# EAGLE board Qwiic_MultiStar_pattern-Panel (EAGLE 9.6.2)
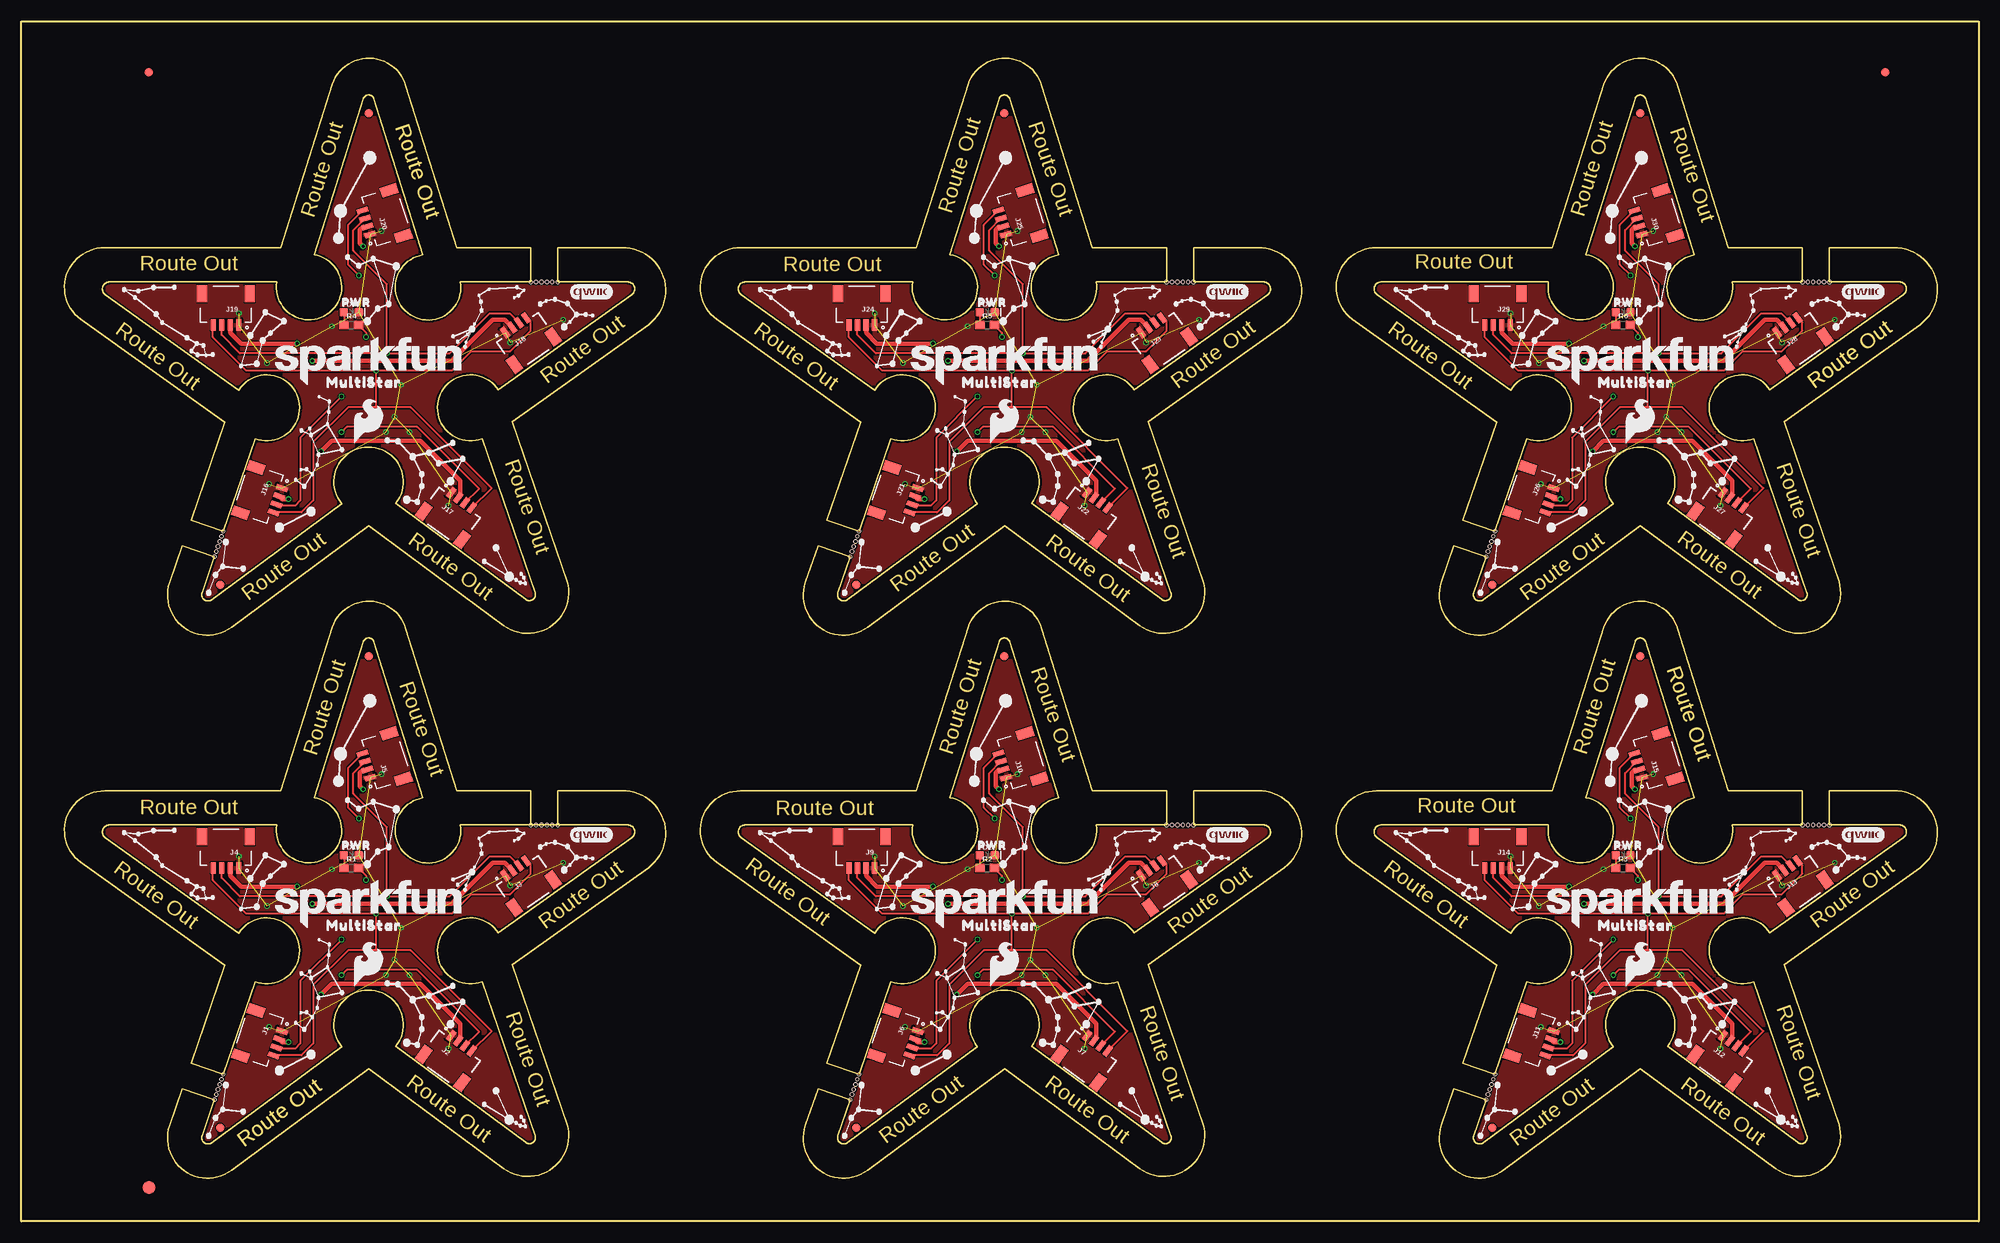
[diagram p0: board, top side]
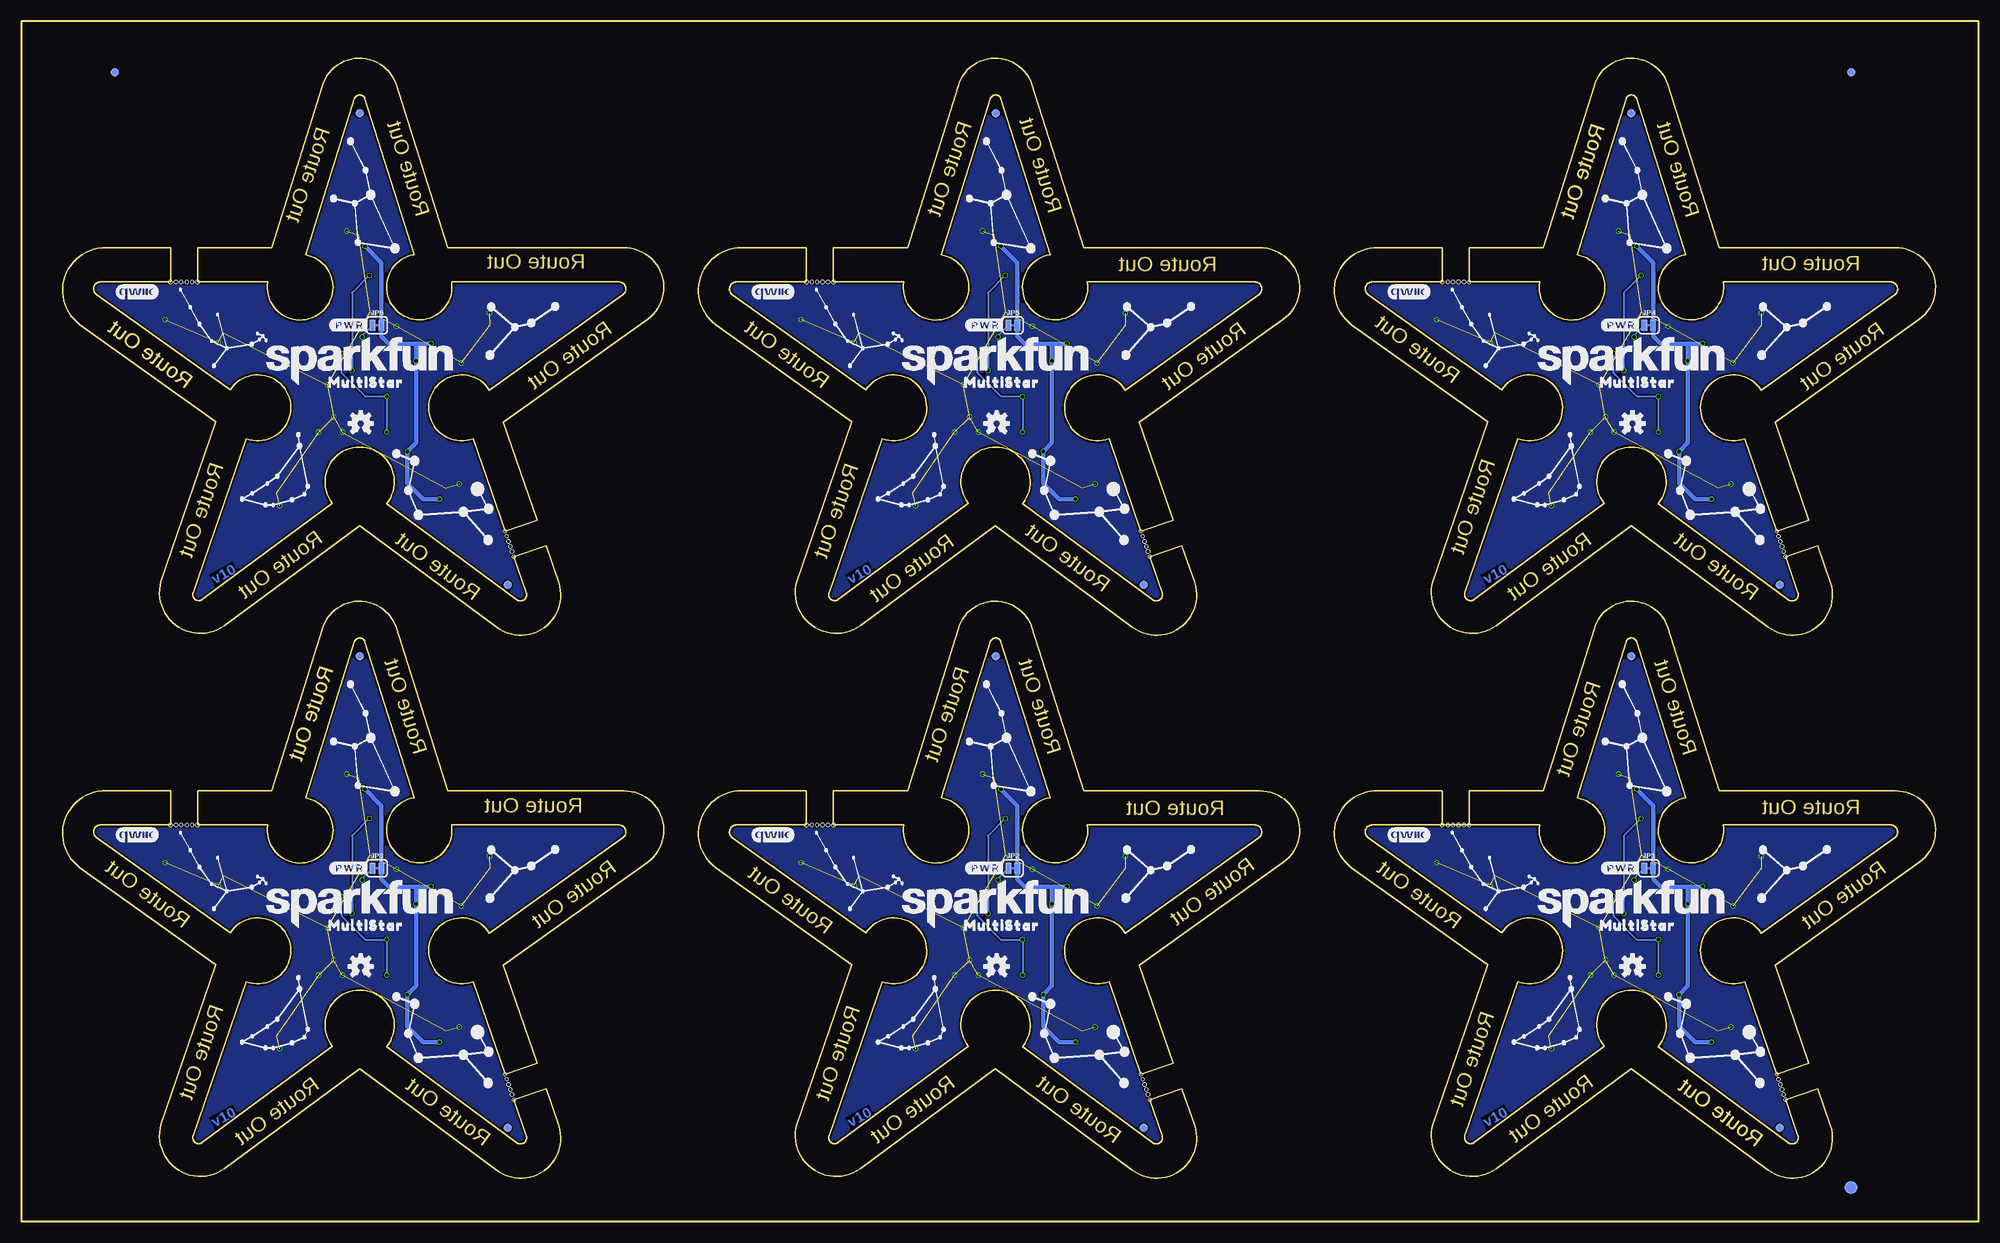
[diagram p1: board, bottom side, seen from below]

Size 229.99 x 141 mm. Coordinates in mm from the lower left corner, seen from the top.
Outline: 63.03,46.58 71.24,46.58 arc-144 71.72,45.08 56.04,33.89 arc258 54.14,28.16 60.37,10.05 arc-145 59.27,9.27 44,20.57 arc257 37.63,20.54 22.36,9.23 arc-145 21.23,10.05 22.69,14.29 18.91,15.59 17.42,11.26 arc145 24.72,6 40.82,17.92 56.71,6.2 arc142 64.15,11.38 57.69,30.14 73.7,41.57 arc145 70.59,50.58 63.03,50.58 63.03,46.58
Outline: 63.03,46.58 59.85,46.58
Outline: 59.85,46.58 51.6,46.58 arc-270 47.17,49.76 41.42,68.09 arc145 40.19,68.09 34.41,49.77 arc-270 30.01,46.58 10.37,46.58 arc144 9.88,45.07 25.56,33.88 arc-258 27.47,28.16 23.73,17.29 19.94,18.59 23.91,30.11 6.99,42.18 arc-145 9.79,50.58 30.47,50.58 36.53,69.8 arc-145 45.2,69.58 51.15,50.59 59.85,50.58 59.85,46.58
Outline: 121.88,49.76 116.13,68.09 arc145 114.89,68.09 109.12,49.77 arc-270 104.72,46.58 85.08,46.58 arc144 84.59,45.07 100.27,33.88 arc-258 102.18,28.16 98.44,17.29 94.65,18.59 98.62,30.11 81.69,42.18 arc-145 84.5,50.58 105.18,50.58 111.24,69.8 arc-145 119.91,69.58 125.86,50.59 134.56,50.58 134.56,46.58 126.31,46.58 arc-270 121.88,49.76
Outline: 97.4,14.29 95.94,10.05 arc145 97.07,9.23 112.34,20.54 arc-257 118.71,20.57 133.98,9.27 arc145 135.08,10.05 128.85,28.16 arc-258 130.75,33.89 146.43,45.08 arc144 145.95,46.58 137.74,46.58 137.74,50.58 145.3,50.58 arc-145 148.41,41.57 132.4,30.14 138.86,11.38 arc-142 131.42,6.2 115.53,17.92 99.43,6 arc-145 92.13,11.26 93.62,15.59 97.4,14.29
Outline: 196.59,49.76 190.84,68.09 arc145 189.61,68.09 183.83,49.77 arc-270 179.43,46.58 159.79,46.58 arc144 159.3,45.07 174.98,33.88 arc-258 176.89,28.16 173.15,17.29 169.37,18.59 173.33,30.11 156.41,42.18 arc-145 159.21,50.58 179.89,50.58 185.95,69.8 arc-145 194.62,69.58 200.57,50.59 209.27,50.58 209.27,46.58 201.02,46.58 arc-270 196.59,49.76
Outline: 172.11,14.29 170.66,10.05 arc145 171.78,9.23 187.06,20.54 arc-257 193.42,20.57 208.7,9.27 arc145 209.79,10.05 203.56,28.16 arc-258 205.46,33.89 221.14,45.08 arc144 220.66,46.58 212.45,46.58 212.45,50.58 220.01,50.58 arc-145 223.12,41.57 207.11,30.14 213.57,11.38 arc-142 206.13,6.2 190.24,17.92 174.14,6 arc-145 166.84,11.26 168.33,15.59 172.11,14.29
Outline: 47.17,113.56 41.42,131.89 arc145 40.19,131.89 34.41,113.57 arc-270 30.01,110.38 10.37,110.38 arc144 9.88,108.86 25.56,97.68 arc-258 27.47,91.96 23.73,81.09 19.94,82.39 23.91,93.91 6.99,105.98 arc-145 9.79,114.38 30.47,114.38 36.53,133.6 arc-145 45.2,133.38 51.15,114.39 59.85,114.38 59.85,110.38 51.6,110.38 arc-270 47.17,113.56
Outline: 22.69,78.09 21.23,73.86 arc145 22.36,73.03 37.63,84.33 arc-257 44,84.37 59.27,73.07 arc145 60.37,73.86 54.14,91.96 arc-258 56.04,97.69 71.72,108.88 arc144 71.24,110.38 63.03,110.38 63.03,114.38 70.59,114.38 arc-145 73.7,105.37 57.69,93.94 64.15,75.17 arc-142 56.71,70 40.82,81.72 24.72,69.8 arc-145 17.42,75.06 18.91,79.39 22.69,78.09
Outline: 121.88,113.56 116.13,131.89 arc145 114.89,131.89 109.12,113.57 arc-270 104.72,110.38 85.08,110.38 arc144 84.59,108.86 100.27,97.68 arc-258 102.18,91.96 98.44,81.09 94.65,82.39 98.62,93.91 81.69,105.98 arc-145 84.5,114.38 105.18,114.38 111.24,133.6 arc-145 119.91,133.38 125.86,114.39 134.56,114.38 134.56,110.38 126.31,110.38 arc-270 121.88,113.56
Outline: 97.4,78.09 95.94,73.86 arc145 97.07,73.03 112.34,84.33 arc-257 118.71,84.37 133.98,73.07 arc145 135.08,73.86 128.85,91.96 arc-258 130.75,97.69 146.43,108.88 arc144 145.95,110.38 137.74,110.38 137.74,114.38 145.3,114.38 arc-145 148.41,105.37 132.4,93.94 138.86,75.17 arc-142 131.42,70 115.53,81.72 99.43,69.8 arc-145 92.13,75.06 93.62,79.39 97.4,78.09
Outline: 196.59,113.56 190.84,131.89 arc145 189.61,131.89 183.83,113.57 arc-270 179.43,110.38 159.79,110.38 arc144 159.3,108.86 174.98,97.68 arc-258 176.89,91.96 173.15,81.09 169.37,82.39 173.33,93.91 156.41,105.98 arc-145 159.21,114.38 179.89,114.38 185.95,133.6 arc-145 194.62,133.38 200.57,114.39 209.27,114.38 209.27,110.38 201.02,110.38 arc-270 196.59,113.56
Outline: 172.11,78.09 170.66,73.86 arc145 171.78,73.03 187.06,84.33 arc-257 193.42,84.37 208.7,73.07 arc145 209.79,73.86 203.56,91.96 arc-258 205.46,97.69 221.14,108.88 arc144 220.66,110.38 212.45,110.38 212.45,114.38 220.01,114.38 arc-145 223.12,105.37 207.11,93.94 213.57,75.17 arc-142 206.13,70 190.24,81.72 174.14,69.8 arc-145 166.84,75.06 168.33,79.39 172.11,78.09
Outline: 229.99,0 0,0 0,141 229.99,141 229.99,0
Copper layers (1*16): Top 0.035mm / dielectric 1.5mm / Bottom 0.035mm
Design rules "Qwiic_MultiStar_pattern": minimum track width 5mil, minimum drill 0.3mm, track to track 5mil, track to pad 5mil, pad to pad 5mil, via to via 5mil, smd to smd 5mil, copper to edge 7mil, drill to drill 7mil, minimum pad ring 5mil, minimum via ring 5mil, stop-mask expansion 2.5mil, vias tented up to drill 25mil, thermal gap 10mil
Holes 0.4 mm at 59.85,46.58 60.49,46.58 61.12,46.58 61.76,46.58 62.39,46.58 63.03,46.58 22.69,14.29 22.9,14.89 23.11,15.49 23.31,16.09 23.52,16.69 23.73,17.29 134.56,46.58 135.2,46.58 135.83,46.58 136.47,46.58 137.1,46.58 137.74,46.58 97.4,14.29 97.61,14.89 97.82,15.49 98.02,16.09 98.23,16.69 98.44,17.29 209.27,46.58 209.91,46.58 210.54,46.58 211.18,46.58 211.81,46.58 212.45,46.58 172.11,14.29 172.32,14.89 172.53,15.49 172.73,16.09 172.94,16.69 173.15,17.29 59.85,110.38 60.49,110.38 61.12,110.38 61.76,110.38 62.39,110.38 63.03,110.38 22.69,78.09 22.9,78.69 23.11,79.29 23.31,79.89 23.52,80.49 23.73,81.09 134.56,110.38 135.2,110.38 135.83,110.38 136.47,110.38 137.1,110.38 137.74,110.38 97.4,78.09 97.61,78.69 97.82,79.29 98.02,79.89 98.23,80.49 98.44,81.09 209.27,110.38 209.91,110.38 210.54,110.38 211.18,110.38 211.81,110.38 212.45,110.38 172.11,78.09 172.32,78.69 172.53,79.29 172.73,79.89 172.94,80.49 173.15,81.09

## Footprints (pad centres in the part's own frame; a part is rotated, then mirrored left to right if it is on the bottom)
LED-0603 = smd 1 x 1: A -0.877,0; C 0.877,0
FIDUCIAL-1X2 = smd 1 x 1: 1 0,0
FIDUCIAL-1.5X3 = smd 1.5 x 1.5: 1 0,0
JST04_1MM_RA = smd 0.6 x 1.35: 1 -1.5,0; 2 -0.5,0; 3 0.5,0; 4 1.5,0 | smd 1.2 x 2: NC1 2.8,-3.675; NC2 -2.8,-3.675
SMT-JUMPER_2_NC_TRACE_SILK = smd 0.66 x 1.27: 1 -0.521,0; 2 0.521,0
0603 = smd 1.1 x 1: 1 -0.85,0; 2 0.85,0

## Placement (x,y rotation side)
D1  RED  [LED-0603]  38.77,43.02 0 top
D2  RED  [LED-0603]  113.48,43.02 0 top
D3  RED  [LED-0603]  188.19,43.02 0 top
D4  RED  [LED-0603]  38.77,106.82 0 top
D5  RED  [LED-0603]  113.48,106.82 0 top
D6  RED  [LED-0603]  188.19,106.82 0 top
E$1  [FIDUCIAL-1X2]  14.98,135 0 top
E$2  [FIDUCIAL-1X2]  14.98,135 0 bottom
E$3  [FIDUCIAL-1X2]  218.99,135 0 top
E$4  [FIDUCIAL-1X2]  218.99,135 0 bottom
E$5  [FIDUCIAL-1.5X3]  14.98,4 0 top
E$6  [FIDUCIAL-1.5X3]  14.98,4 0 bottom
FD1  FIDUCIAL1X2  [FIDUCIAL-1X2]  23.4,11.02 0 top
FD2  FIDUCIAL1X2  [FIDUCIAL-1X2]  23.4,11.02 0 bottom
FD3  FIDUCIAL1X2  [FIDUCIAL-1X2]  40.8,66.39 0 top
FD4  FIDUCIAL1X2  [FIDUCIAL-1X2]  40.8,66.39 0 bottom
FD5  FIDUCIAL1X2  [FIDUCIAL-1X2]  98.11,11.02 0 top
FD6  FIDUCIAL1X2  [FIDUCIAL-1X2]  98.11,11.02 0 bottom
FD7  FIDUCIAL1X2  [FIDUCIAL-1X2]  115.51,66.39 0 top
FD8  FIDUCIAL1X2  [FIDUCIAL-1X2]  115.51,66.39 0 bottom
FD9  FIDUCIAL1X2  [FIDUCIAL-1X2]  172.83,11.02 0 top
FD10  FIDUCIAL1X2  [FIDUCIAL-1X2]  172.83,11.02 0 bottom
FD11  FIDUCIAL1X2  [FIDUCIAL-1X2]  190.22,66.39 0 top
FD12  FIDUCIAL1X2  [FIDUCIAL-1X2]  190.22,66.39 0 bottom
FD13  FIDUCIAL1X2  [FIDUCIAL-1X2]  23.4,74.82 0 top
FD14  FIDUCIAL1X2  [FIDUCIAL-1X2]  23.4,74.82 0 bottom
FD15  FIDUCIAL1X2  [FIDUCIAL-1X2]  40.8,130.19 0 top
FD16  FIDUCIAL1X2  [FIDUCIAL-1X2]  40.8,130.19 0 bottom
FD17  FIDUCIAL1X2  [FIDUCIAL-1X2]  98.11,74.82 0 top
FD18  FIDUCIAL1X2  [FIDUCIAL-1X2]  98.11,74.82 0 bottom
FD19  FIDUCIAL1X2  [FIDUCIAL-1X2]  115.51,130.19 0 top
FD20  FIDUCIAL1X2  [FIDUCIAL-1X2]  115.51,130.19 0 bottom
FD21  FIDUCIAL1X2  [FIDUCIAL-1X2]  172.83,74.82 0 top
FD22  FIDUCIAL1X2  [FIDUCIAL-1X2]  172.83,74.82 0 bottom
FD23  FIDUCIAL1X2  [FIDUCIAL-1X2]  190.22,130.19 0 top
FD24  FIDUCIAL1X2  [FIDUCIAL-1X2]  190.22,130.19 0 bottom
J1  QWIIC_RIGHT_ANGLE  [JST04_1MM_RA]  30.14,20.92 251 top
J2  QWIIC_RIGHT_ANGLE  [JST04_1MM_RA]  51.73,20.92 323.5 top
J3  QWIIC_RIGHT_ANGLE  [JST04_1MM_RA]  58.08,41.5 35.5 top
J4  QWIIC_RIGHT_ANGLE  [JST04_1MM_RA]  24.04,41.5 180 top
J5  QWIIC_RIGHT_ANGLE  [JST04_1MM_RA]  40.55,53.56 107.4 top
J6  QWIIC_RIGHT_ANGLE  [JST04_1MM_RA]  104.84,20.92 251 top
J7  QWIIC_RIGHT_ANGLE  [JST04_1MM_RA]  126.43,20.92 323.5 top
J8  QWIIC_RIGHT_ANGLE  [JST04_1MM_RA]  132.78,41.5 35.5 top
J9  QWIIC_RIGHT_ANGLE  [JST04_1MM_RA]  98.75,41.5 180 top
J10  QWIIC_RIGHT_ANGLE  [JST04_1MM_RA]  115.26,53.56 107.4 top
J11  QWIIC_RIGHT_ANGLE  [JST04_1MM_RA]  179.56,20.92 251 top
J12  QWIIC_RIGHT_ANGLE  [JST04_1MM_RA]  201.15,20.92 323.5 top
J13  QWIIC_RIGHT_ANGLE  [JST04_1MM_RA]  207.5,41.5 35.5 top
J14  QWIIC_RIGHT_ANGLE  [JST04_1MM_RA]  173.46,41.5 180 top
J15  QWIIC_RIGHT_ANGLE  [JST04_1MM_RA]  189.97,53.56 107.4 top
J16  QWIIC_RIGHT_ANGLE  [JST04_1MM_RA]  30.14,84.72 251 top
J17  QWIIC_RIGHT_ANGLE  [JST04_1MM_RA]  51.73,84.72 323.5 top
J18  QWIIC_RIGHT_ANGLE  [JST04_1MM_RA]  58.08,105.3 35.5 top
J19  QWIIC_RIGHT_ANGLE  [JST04_1MM_RA]  24.04,105.3 180 top
J20  QWIIC_RIGHT_ANGLE  [JST04_1MM_RA]  40.55,117.36 107.4 top
J21  QWIIC_RIGHT_ANGLE  [JST04_1MM_RA]  104.84,84.72 251 top
J22  QWIIC_RIGHT_ANGLE  [JST04_1MM_RA]  126.43,84.72 323.5 top
J23  QWIIC_RIGHT_ANGLE  [JST04_1MM_RA]  132.78,105.3 35.5 top
J24  QWIIC_RIGHT_ANGLE  [JST04_1MM_RA]  98.75,105.3 180 top
J25  QWIIC_RIGHT_ANGLE  [JST04_1MM_RA]  115.26,117.36 107.4 top
J26  QWIIC_RIGHT_ANGLE  [JST04_1MM_RA]  179.56,84.72 251 top
J27  QWIIC_RIGHT_ANGLE  [JST04_1MM_RA]  201.15,84.72 323.5 top
J28  QWIIC_RIGHT_ANGLE  [JST04_1MM_RA]  207.5,105.3 35.5 top
J29  QWIIC_RIGHT_ANGLE  [JST04_1MM_RA]  173.46,105.3 180 top
J30  QWIIC_RIGHT_ANGLE  [JST04_1MM_RA]  189.97,117.36 107.4 top
JP1  PWR_LED  [SMT-JUMPER_2_NC_TRACE_SILK]  38.77,41.5 0 bottom
JP2  PWR_LED  [SMT-JUMPER_2_NC_TRACE_SILK]  113.48,41.5 0 bottom
JP3  PWR_LED  [SMT-JUMPER_2_NC_TRACE_SILK]  188.19,41.5 0 bottom
JP4  PWR_LED  [SMT-JUMPER_2_NC_TRACE_SILK]  38.77,105.3 0 bottom
JP5  PWR_LED  [SMT-JUMPER_2_NC_TRACE_SILK]  113.48,105.3 0 bottom
JP6  PWR_LED  [SMT-JUMPER_2_NC_TRACE_SILK]  188.19,105.3 0 bottom
LOGO1  QWIIC_LOGO_5MM  [QWIIC_5MM]  66.97,45.43 0 bottom
LOGO2  QWIIC_LOGO_5MM  [QWIIC_5MM]  66.97,45.43 0 top
LOGO3  OSHW-LOGOS  [OSHW-LOGO-S]  40.68,29.94 0 bottom
LOGO4  SFE_LOGO_NAME.2_INCH  [SFE_LOGO_NAME_.2]  40.8,37.31 0 bottom
LOGO5  SFE_LOGO_NAME.2_INCH  [SFE_LOGO_NAME_.2]  40.8,37.31 0 top
LOGO6  QWIIC_LOGO_5MM  [QWIIC_5MM]  141.67,45.43 0 bottom
LOGO7  QWIIC_LOGO_5MM  [QWIIC_5MM]  141.67,45.43 0 top
LOGO8  OSHW-LOGOS  [OSHW-LOGO-S]  115.39,29.94 0 bottom
LOGO9  SFE_LOGO_NAME.2_INCH  [SFE_LOGO_NAME_.2]  115.51,37.31 0 bottom
LOGO10  SFE_LOGO_NAME.2_INCH  [SFE_LOGO_NAME_.2]  115.51,37.31 0 top
LOGO11  QWIIC_LOGO_5MM  [QWIIC_5MM]  216.39,45.43 0 bottom
LOGO12  QWIIC_LOGO_5MM  [QWIIC_5MM]  216.39,45.43 0 top
LOGO13  OSHW-LOGOS  [OSHW-LOGO-S]  190.1,29.94 0 bottom
LOGO14  SFE_LOGO_NAME.2_INCH  [SFE_LOGO_NAME_.2]  190.22,37.31 0 bottom
LOGO15  SFE_LOGO_NAME.2_INCH  [SFE_LOGO_NAME_.2]  190.22,37.31 0 top
LOGO16  QWIIC_LOGO_5MM  [QWIIC_5MM]  66.97,109.23 0 bottom
LOGO17  QWIIC_LOGO_5MM  [QWIIC_5MM]  66.97,109.23 0 top
LOGO18  OSHW-LOGOS  [OSHW-LOGO-S]  40.68,93.74 0 bottom
LOGO19  SFE_LOGO_NAME.2_INCH  [SFE_LOGO_NAME_.2]  40.8,101.11 0 bottom
LOGO20  SFE_LOGO_NAME.2_INCH  [SFE_LOGO_NAME_.2]  40.8,101.11 0 top
LOGO21  QWIIC_LOGO_5MM  [QWIIC_5MM]  141.67,109.23 0 bottom
LOGO22  QWIIC_LOGO_5MM  [QWIIC_5MM]  141.67,109.23 0 top
LOGO23  OSHW-LOGOS  [OSHW-LOGO-S]  115.39,93.74 0 bottom
LOGO24  SFE_LOGO_NAME.2_INCH  [SFE_LOGO_NAME_.2]  115.51,101.11 0 bottom
LOGO25  SFE_LOGO_NAME.2_INCH  [SFE_LOGO_NAME_.2]  115.51,101.11 0 top
LOGO26  QWIIC_LOGO_5MM  [QWIIC_5MM]  216.39,109.23 0 bottom
LOGO27  QWIIC_LOGO_5MM  [QWIIC_5MM]  216.39,109.23 0 top
LOGO28  OSHW-LOGOS  [OSHW-LOGO-S]  190.1,93.74 0 bottom
LOGO29  SFE_LOGO_NAME.2_INCH  [SFE_LOGO_NAME_.2]  190.22,101.11 0 bottom
LOGO30  SFE_LOGO_NAME.2_INCH  [SFE_LOGO_NAME_.2]  190.22,101.11 0 top
R1  1k  [0603]  38.77,41.5 0 top
R2  1k  [0603]  113.48,41.5 0 top
R3  1k  [0603]  188.19,41.5 0 top
R4  1k  [0603]  38.77,105.3 0 top
R5  1k  [0603]  113.48,105.3 0 top
R6  1k  [0603]  188.19,105.3 0 top
U$1  [PWR0]  111.7,44.16 0 top
U$2  [SFE_LOGO_FLAME_.2]  40.8,30.19 0 top
U$3  [MULTISTAR0]  34.96,34.77 0 top
U$4  [SFE_LOGO_FLAME_.2]  115.51,30.19 0 top
U$5  [MULTISTAR0]  45.38,34.77 0 bottom
U$6  [#PWR#0]  44.36,41.5 0 bottom
U$7  [MULTISTAR0]  109.67,34.77 0 top
U$8  [MULTISTAR0]  120.08,34.77 0 bottom
U$9  [PWR0]  36.99,44.16 0 top
U$10  [#PWR#0]  119.07,41.5 0 bottom
U$11  [PWR0]  186.41,44.16 0 top
U$12  [SFE_LOGO_FLAME_.2]  190.22,30.19 0 top
U$13  [MULTISTAR0]  184.38,34.77 0 top
U$14  [MULTISTAR0]  194.8,34.77 0 bottom
U$15  [#PWR#0]  193.78,41.5 0 bottom
U$16  [PWR0]  36.99,107.96 0 top
U$17  [SFE_LOGO_FLAME_.2]  40.8,93.99 0 top
U$18  [MULTISTAR0]  34.96,98.57 0 top
U$19  [MULTISTAR0]  45.38,98.57 0 bottom
U$20  [#PWR#0]  44.36,105.3 0 bottom
U$21  [PWR0]  111.7,107.96 0 top
U$22  [SFE_LOGO_FLAME_.2]  115.51,93.99 0 top
U$23  [MULTISTAR0]  109.67,98.57 0 top
U$24  [MULTISTAR0]  120.08,98.57 0 bottom
U$25  [#PWR#0]  119.07,105.3 0 bottom
U$26  [PWR0]  186.41,107.96 0 top
U$27  [SFE_LOGO_FLAME_.2]  190.22,93.99 0 top
U$28  [MULTISTAR0]  184.38,98.57 0 top
U$29  [MULTISTAR0]  194.8,98.57 0 bottom
U$30  [#PWR#0]  193.78,105.3 0 bottom

## Library data of the parts
D1-D6 = SparkFun-LED; PROD_ID: DIO-00819
E$1-E$4 FD1-FD24 LOGO1-LOGO30 U$2 U$4 U$12 U$17 U$22 U$27 = SparkFun-Aesthetics
E$5 E$6 = SparkFun-Retired
J1-J30 = SparkFun-Connectors; PROD_ID: CONN-13694
JP1-JP6 = SparkFun-Jumpers
R1-R6 = SparkFun-Resistors; PROD_ID: RES-07856
U$1 U$3 U$5-U$11 U$13-U$16 U$18-U$21 U$23-U$26 U$28-U$30 = output

## Nets
3.3V: J1.2 J2.2 J3.2 J4.2 J5.2 JP1.2
3.3V1: J6.2 J7.2 J8.2 J9.2 J10.2 JP2.2
3.3V2: J11.2 J12.2 J13.2 J14.2 J15.2 JP3.2
3.3V3: J16.2 J17.2 J18.2 J19.2 J20.2 JP4.2
3.3V4: J21.2 J22.2 J23.2 J24.2 J25.2 JP5.2
3.3V5: J26.2 J27.2 J28.2 J29.2 J30.2 JP6.2
GND: D1.C J1.1 J2.1 J3.1 J4.1 J5.1
GND1: D2.C J6.1 J7.1 J8.1 J9.1 J10.1
GND2: D3.C J11.1 J12.1 J13.1 J14.1 J15.1
GND3: D4.C J16.1 J17.1 J18.1 J19.1 J20.1
GND4: D5.C J21.1 J22.1 J23.1 J24.1 J25.1
GND5: D6.C J26.1 J27.1 J28.1 J29.1 J30.1
N$1: D1.A R1.1
N$2: JP1.1 R1.2
N$3: D2.A R2.1
N$4: JP2.1 R2.2
N$5: D3.A R3.1
N$6: JP3.1 R3.2
N$7: D4.A R4.1
N$8: JP4.1 R4.2
N$9: D5.A R5.1
N$10: JP5.1 R5.2
N$11: D6.A R6.1
N$12: JP6.1 R6.2
SCL: J1.4 J2.4 J3.4 J4.4 J5.4
SCL1: J6.4 J7.4 J8.4 J9.4 J10.4
SCL2: J11.4 J12.4 J13.4 J14.4 J15.4
SCL3: J16.4 J17.4 J18.4 J19.4 J20.4
SCL4: J21.4 J22.4 J23.4 J24.4 J25.4
SCL5: J26.4 J27.4 J28.4 J29.4 J30.4
SDA: J1.3 J2.3 J3.3 J4.3 J5.3
SDA1: J6.3 J7.3 J8.3 J9.3 J10.3
SDA2: J11.3 J12.3 J13.3 J14.3 J15.3
SDA3: J16.3 J17.3 J18.3 J19.3 J20.3
SDA4: J21.3 J22.3 J23.3 J24.3 J25.3
SDA5: J26.3 J27.3 J28.3 J29.3 J30.3

## Tracks (layer width: path | path; a pad name or v marks a point on that pad's centre or on a via)
3.3V  (via drill 0.38)
  Top 0.508: v34.19,37.31 50.58,37.31 55.41,42.13 56.81,42.13 57.67,41.27 J3.2 | v32.42,39.34 25.82,39.34 24.54,40.62 J4.2 | v40.17,50.77 39.79,51.15 39.79,52.71 40.16,53.09 J5.2 | v35.2,26.64 36.47,27.91 46.9,27.91 51.58,23.23 51.58,21.48 J2.2 | v31.41,21.05 30.64,21.05 J1.2
  Bottom 0.508: v31.41,21.05 33.31,21.05 35.2,22.94 v35.2,26.64 34.19,27.65 v34.19,37.31 34.19,39.34 | v40.17,50.77 38.25,48.85 JP1.2 38.25,40.22 37.38,39.34 34.19,39.34 | v32.42,39.34 34.19,39.34
3.3V1  (via drill 0.38)
  Top 0.508: v108.9,37.31 125.29,37.31 130.12,42.13 131.52,42.13 132.38,41.27 J8.2 | v107.13,39.34 100.53,39.34 99.25,40.62 J9.2 | v114.88,50.77 114.5,51.15 114.5,52.71 114.87,53.09 J10.2 | v109.91,26.64 111.18,27.91 121.61,27.91 126.29,23.23 126.29,21.48 J7.2 | v106.11,21.05 105.35,21.05 J6.2
  Bottom 0.508: v106.11,21.05 108.02,21.05 109.91,22.94 v109.91,26.64 108.9,27.65 v108.9,37.31 108.9,39.34 | v114.88,50.77 112.96,48.85 JP2.2 112.96,40.22 112.08,39.34 108.9,39.34 | v107.13,39.34 108.9,39.34
3.3V2  (via drill 0.38)
  Top 0.508: v183.61,37.31 200,37.31 204.83,42.13 206.23,42.13 207.09,41.27 J13.2 | v181.84,39.34 175.24,39.34 173.96,40.62 J14.2 | v189.59,50.77 189.21,51.15 189.21,52.71 189.58,53.09 J15.2 | v184.62,26.64 185.89,27.91 196.32,27.91 201,23.23 201,21.48 J12.2 | v180.83,21.05 180.07,21.05 J11.2
  Bottom 0.508: v180.83,21.05 182.73,21.05 184.62,22.94 v184.62,26.64 183.61,27.65 v183.61,37.31 183.61,39.34 | v189.59,50.77 187.67,48.85 JP3.2 187.67,40.22 186.8,39.34 183.61,39.34 | v181.84,39.34 183.61,39.34
3.3V3  (via drill 0.38)
  Top 0.508: v34.19,101.11 50.58,101.11 55.41,105.93 56.81,105.93 57.67,105.07 J18.2 | v32.42,103.14 25.82,103.14 24.54,104.42 J19.2 | v40.17,114.57 39.79,114.95 39.79,116.51 40.16,116.89 J20.2 | v35.2,90.44 36.47,91.71 46.9,91.71 51.58,87.03 51.58,85.27 J17.2 | v31.41,84.85 30.64,84.85 J16.2
  Bottom 0.508: v31.41,84.85 33.31,84.85 35.2,86.74 v35.2,90.44 34.19,91.45 v34.19,101.11 34.19,103.14 | v40.17,114.57 38.25,112.65 JP4.2 38.25,104.01 37.38,103.14 34.19,103.14 | v32.42,103.14 34.19,103.14
3.3V4  (via drill 0.38)
  Top 0.508: v108.9,101.11 125.29,101.11 130.12,105.93 131.52,105.93 132.38,105.07 J23.2 | v107.13,103.14 100.53,103.14 99.25,104.42 J24.2 | v114.88,114.57 114.5,114.95 114.5,116.51 114.87,116.89 J25.2 | v109.91,90.44 111.18,91.71 121.61,91.71 126.29,87.03 126.29,85.27 J22.2 | v106.11,84.85 105.35,84.85 J21.2
  Bottom 0.508: v106.11,84.85 108.02,84.85 109.91,86.74 v109.91,90.44 108.9,91.45 v108.9,101.11 108.9,103.14 | v114.88,114.57 112.96,112.65 JP5.2 112.96,104.01 112.08,103.14 108.9,103.14 | v107.13,103.14 108.9,103.14
3.3V5  (via drill 0.38)
  Top 0.508: v183.61,101.11 200,101.11 204.83,105.93 206.23,105.93 207.09,105.07 J28.2 | v181.84,103.14 175.24,103.14 173.96,104.42 J29.2 | v189.59,114.57 189.21,114.95 189.21,116.51 189.58,116.89 J30.2 | v184.62,90.44 185.89,91.71 196.32,91.71 201,87.03 201,85.27 J27.2 | v180.83,84.85 180.07,84.85 J26.2
  Bottom 0.508: v180.83,84.85 182.73,84.85 184.62,86.74 v184.62,90.44 183.61,91.45 v183.61,101.11 183.61,103.14 | v189.59,114.57 187.67,112.65 JP6.2 187.67,104.01 186.8,103.14 183.61,103.14 | v181.84,103.14 183.61,103.14
GND  (via drill 0.35, 0.38)  (17 unrouted)
  other vias: 25.56,42.89 36.49,41.37 42.33,52.55 57.44,39.47 50.2,20.29 29.12,22.83 63.66,42.13 44.61,34.51 43.85,30.7 28.87,37.05 42.84,28.92 45.63,28.92
  pour Top: 9.05,7.84 73.82,7.84 73.82,70.07 9.05,70.07
  pour Bottom: 9.05,7.84 73.82,7.84 73.82,70.07 9.05,70.07
GND1  (via drill 0.35, 0.38)  (17 unrouted)
  other vias: 100.27,42.89 111.19,41.37 117.04,52.55 132.15,39.47 124.91,20.29 103.83,22.83 138.37,42.13 119.32,34.51 118.56,30.7 103.57,37.05 117.54,28.92 120.34,28.92
  pour Top: 83.76,7.84 148.53,7.84 148.53,70.07 83.76,70.07
  pour Bottom: 83.76,7.84 148.53,7.84 148.53,70.07 83.76,70.07
GND2  (via drill 0.35, 0.38)  (17 unrouted)
  other vias: 174.98,42.89 185.91,41.37 191.75,52.55 206.86,39.47 199.62,20.29 178.54,22.83 213.08,42.13 194.03,34.51 193.27,30.7 178.29,37.05 192.26,28.92 195.05,28.92
  pour Top: 158.47,7.84 223.24,7.84 223.24,70.07 158.47,70.07
  pour Bottom: 158.47,7.84 223.24,7.84 223.24,70.07 158.47,70.07
GND3  (via drill 0.35, 0.38)  (17 unrouted)
  other vias: 25.56,106.69 36.49,105.17 42.33,116.35 57.44,103.27 50.2,84.09 29.12,86.63 63.66,105.93 44.61,98.31 43.85,94.5 28.87,100.85 42.84,92.72 45.63,92.72
  pour Top: 9.05,71.64 73.82,71.64 73.82,133.87 9.05,133.87
  pour Bottom: 9.05,71.64 73.82,71.64 73.82,133.87 9.05,133.87
GND4  (via drill 0.35, 0.38)  (17 unrouted)
  other vias: 100.27,106.69 111.19,105.17 117.04,116.35 132.15,103.27 124.91,84.09 103.83,86.63 138.37,105.93 119.32,98.31 118.56,94.5 103.57,100.85 117.54,92.72 120.34,92.72
  pour Top: 83.76,71.64 148.53,71.64 148.53,133.87 83.76,133.87
  pour Bottom: 83.76,71.64 148.53,71.64 148.53,133.87 83.76,133.87
GND5  (via drill 0.35, 0.38)  (17 unrouted)
  other vias: 174.98,106.69 185.91,105.17 191.75,116.35 206.86,103.27 199.62,84.09 178.54,86.63 213.08,105.93 194.03,98.31 193.27,94.5 178.29,100.85 192.26,92.72 195.05,92.72
  pour Top: 158.47,71.64 223.24,71.64 223.24,133.87 158.47,133.87
  pour Bottom: 158.47,71.64 223.24,71.64 223.24,133.87 158.47,133.87
N$1
  Top 0.254: D1.A 37.92,42.99 R1.1
N$2  (via drill 0.38)
  Top 0.254: R1.2 40.51,40.61 v40.51,40.1
  Bottom 0.254: JP1.1 40.51,40.28 v40.51,40.1
N$3
  Top 0.254: D2.A 112.63,42.99 R2.1
N$4  (via drill 0.38)
  Top 0.254: R2.2 115.22,40.61 v115.22,40.1
  Bottom 0.254: JP2.1 115.22,40.28 v115.22,40.1
N$5
  Top 0.254: D3.A 187.34,42.99 R3.1
N$6  (via drill 0.38)
  Top 0.254: R3.2 189.93,40.61 v189.93,40.1
  Bottom 0.254: JP3.1 189.93,40.28 v189.93,40.1
N$7
  Top 0.254: D4.A 37.92,106.79 R4.1
N$8  (via drill 0.38)
  Top 0.254: R4.2 40.51,104.41 v40.51,103.9
  Bottom 0.254: JP4.1 40.51,104.08 v40.51,103.9
N$9
  Top 0.254: D5.A 112.63,106.79 R5.1
N$10  (via drill 0.38)
  Top 0.254: R5.2 115.22,104.41 v115.22,103.9
  Bottom 0.254: JP5.1 115.22,104.08 v115.22,103.9
N$11
  Top 0.254: D6.A 187.34,106.79 R6.1
N$12  (via drill 0.38)
  Top 0.254: R6.2 189.93,104.41 v189.93,103.9
  Bottom 0.254: JP6.1 189.93,104.08 v189.93,103.9
SCL  (via drill 0.38)
  Top 0.254: v41.69,36.16 50.58,36.16 52.87,38.45 57.44,38.45 59.85,40.86 59.85,41.81 J3.4 | 41.69,31.84 v41.69,36.16 | 41.69,31.84 45.76,31.84 55.25,22.35 J2.4 | 41.69,31.84 38.39,31.84 34.33,27.78 34.33,20.92 32.91,19.51 J1.4 | v39.66,47.34 38.39,48.61 38.39,53.28 J5.4 | v41.69,36.16 26.45,36.16 22.52,40.1 22.52,41.47 J4.4
  Bottom 0.254: v39.66,47.34 41.69,45.31 v41.69,36.16
SCL1  (via drill 0.38)
  Top 0.254: v116.4,36.16 125.29,36.16 127.58,38.45 132.15,38.45 134.56,40.86 134.56,41.81 J8.4 | 116.4,31.84 v116.4,36.16 | 116.4,31.84 120.47,31.84 129.96,22.35 J7.4 | 116.4,31.84 113.1,31.84 109.04,27.78 109.04,20.92 107.62,19.51 J6.4 | v114.37,47.34 113.1,48.61 113.1,53.28 J10.4 | v116.4,36.16 101.16,36.16 97.22,40.1 97.22,41.47 J9.4
  Bottom 0.254: v114.37,47.34 116.4,45.31 v116.4,36.16
SCL2  (via drill 0.38)
  Top 0.254: v191.11,36.16 200,36.16 202.29,38.45 206.86,38.45 209.27,40.86 209.27,41.81 J13.4 | 191.11,31.84 v191.11,36.16 | 191.11,31.84 195.18,31.84 204.67,22.35 J12.4 | 191.11,31.84 187.81,31.84 183.75,27.78 183.75,20.92 182.33,19.51 J11.4 | v189.08,47.34 187.81,48.61 187.81,53.28 J15.4 | v191.11,36.16 175.87,36.16 171.94,40.1 171.94,41.47 J14.4
  Bottom 0.254: v189.08,47.34 191.11,45.31 v191.11,36.16
SCL3  (via drill 0.38)
  Top 0.254: v41.69,99.96 50.58,99.96 52.87,102.25 57.44,102.25 59.85,104.66 59.85,105.61 J18.4 | 41.69,95.64 v41.69,99.96 | 41.69,95.64 45.76,95.64 55.25,86.15 J17.4 | 41.69,95.64 38.39,95.64 34.33,91.58 34.33,84.72 32.91,83.31 J16.4 | v39.66,111.14 38.39,112.41 38.39,117.08 J20.4 | v41.69,99.96 26.45,99.96 22.52,103.9 22.52,105.27 J19.4
  Bottom 0.254: v39.66,111.14 41.69,109.11 v41.69,99.96
SCL4  (via drill 0.38)
  Top 0.254: v116.4,99.96 125.29,99.96 127.58,102.25 132.15,102.25 134.56,104.66 134.56,105.61 J23.4 | 116.4,95.64 v116.4,99.96 | 116.4,95.64 120.47,95.64 129.96,86.15 J22.4 | 116.4,95.64 113.1,95.64 109.04,91.58 109.04,84.72 107.62,83.31 J21.4 | v114.37,111.14 113.1,112.41 113.1,117.08 J25.4 | v116.4,99.96 101.16,99.96 97.22,103.9 97.22,105.27 J24.4
  Bottom 0.254: v114.37,111.14 116.4,109.11 v116.4,99.96
SCL5  (via drill 0.38)
  Top 0.254: v191.11,99.96 200,99.96 202.29,102.25 206.86,102.25 209.27,104.66 209.27,105.61 J28.4 | 191.11,95.64 v191.11,99.96 | 191.11,95.64 195.18,95.64 204.67,86.15 J27.4 | 191.11,95.64 187.81,95.64 183.75,91.58 183.75,84.72 182.33,83.31 J26.4 | v189.08,111.14 187.81,112.41 187.81,117.08 J30.4 | v191.11,99.96 175.87,99.96 171.94,103.9 171.94,105.27 J29.4
  Bottom 0.254: v189.08,111.14 191.11,109.11 v191.11,99.96
SDA  (via drill 0.38)
  Top 0.254: v42.96,38.2 50.33,38.2 55.03,42.89 57.38,42.89 J3.3 | v37.63,33.11 32.8,28.29 32.8,20.92 32.17,20.29 30.13,20.29 J1.3 | v37.63,28.92 38.26,29.56 46.52,29.56 53.79,22.29 J2.3 | v42.96,38.2 42.96,46.32 39.03,50.26 39.03,52.67 J5.3 | v42.96,38.2 25.69,38.2 23.53,40.35 23.53,41.49 J4.3
  Bottom 0.254: v42.96,38.2 42.96,35.91 40.17,33.11 v37.63,33.11 v37.63,28.92
SDA1  (via drill 0.38)
  Top 0.254: v117.67,38.2 125.04,38.2 129.74,42.89 132.09,42.89 J8.3 | v112.34,33.11 107.51,28.29 107.51,20.92 106.88,20.29 104.84,20.29 J6.3 | v112.34,28.92 112.97,29.56 121.23,29.56 128.5,22.29 J7.3 | v117.67,38.2 117.67,46.32 113.73,50.26 113.73,52.67 J10.3 | v117.67,38.2 100.4,38.2 98.24,40.35 98.24,41.49 J9.3
  Bottom 0.254: v117.67,38.2 117.67,35.91 114.88,33.11 v112.34,33.11 v112.34,28.92
SDA2  (via drill 0.38)
  Top 0.254: v192.38,38.2 199.75,38.2 204.45,42.89 206.8,42.89 J13.3 | v187.05,33.11 182.22,28.29 182.22,20.92 181.59,20.29 179.56,20.29 J11.3 | v187.05,28.92 187.68,29.56 195.94,29.56 203.21,22.29 J12.3 | v192.38,38.2 192.38,46.32 188.45,50.26 188.45,52.67 J15.3 | v192.38,38.2 175.11,38.2 172.95,40.35 172.95,41.49 J14.3
  Bottom 0.254: v192.38,38.2 192.38,35.91 189.59,33.11 v187.05,33.11 v187.05,28.92
SDA3  (via drill 0.38)
  Top 0.254: v42.96,102 50.33,102 55.03,106.69 57.38,106.69 J18.3 | v37.63,96.92 32.8,92.09 32.8,84.72 32.17,84.09 30.13,84.09 J16.3 | v37.63,92.72 38.26,93.36 46.52,93.36 53.79,86.09 J17.3 | v42.96,102 42.96,110.12 39.03,114.06 39.03,116.47 J20.3 | v42.96,102 25.69,102 23.53,104.15 J19.3
  Bottom 0.254: v42.96,102 42.96,99.71 40.17,96.92 v37.63,96.92 v37.63,92.72
SDA4  (via drill 0.38)
  Top 0.254: v117.67,102 125.04,102 129.74,106.69 132.09,106.69 J23.3 | v112.34,96.92 107.51,92.09 107.51,84.72 106.88,84.09 104.84,84.09 J21.3 | v112.34,92.72 112.97,93.36 121.23,93.36 128.5,86.09 J22.3 | v117.67,102 117.67,110.12 113.73,114.06 113.73,116.47 J25.3 | v117.67,102 100.4,102 98.24,104.15 J24.3
  Bottom 0.254: v117.67,102 117.67,99.71 114.88,96.92 v112.34,96.92 v112.34,92.72
SDA5  (via drill 0.38)
  Top 0.254: v192.38,102 199.75,102 204.45,106.69 206.8,106.69 J28.3 | v187.05,96.92 182.22,92.09 182.22,84.72 181.59,84.09 179.56,84.09 J26.3 | v187.05,92.72 187.68,93.36 195.94,93.36 203.21,86.09 J27.3 | v192.38,102 192.38,110.12 188.45,114.06 188.45,116.47 J30.3 | v192.38,102 175.11,102 172.95,104.15 172.95,105.29 J29.3
  Bottom 0.254: v192.38,102 192.38,99.71 189.59,96.92 v187.05,96.92 v187.05,92.72

## Text on the board
Bottom: v10 | v10 | v10 | v10 | v10 | v10
Milling: Route Out | Route Out | Route Out | Route Out | Route Out | Route Out | Route Out | Route Out | Route Out | Route Out | Route Out | Route Out | Route Out | Route Out | Route Out | Route Out | Route Out | Route Out | Route Out | Route Out | Route Out | Route Out | Route Out | Route Out | Route Out | Route Out | Route Out | Route Out | Route Out | Route Out | Route Out | Route Out | Route Out | Route Out | Route Out | Route Out | Route Out | Route Out | Route Out | Route Out | Route Out | Route Out | Route Out | Route Out | Route Out | Route Out | Route Out | Route Out | Route Out | Route Out | Route Out | Route Out